# Altium PCB L2-1.PcbDoc
Units mm, origin at the board's own origin, x right, y up, seen from the top; angles counter-clockwise.
Board outline 68 x 50 mm, 2 copper layers (Top Layer, Bottom Layer), stack 0.325 mm thick; 94 components, 94 nets, 313 pads, 355 vias.
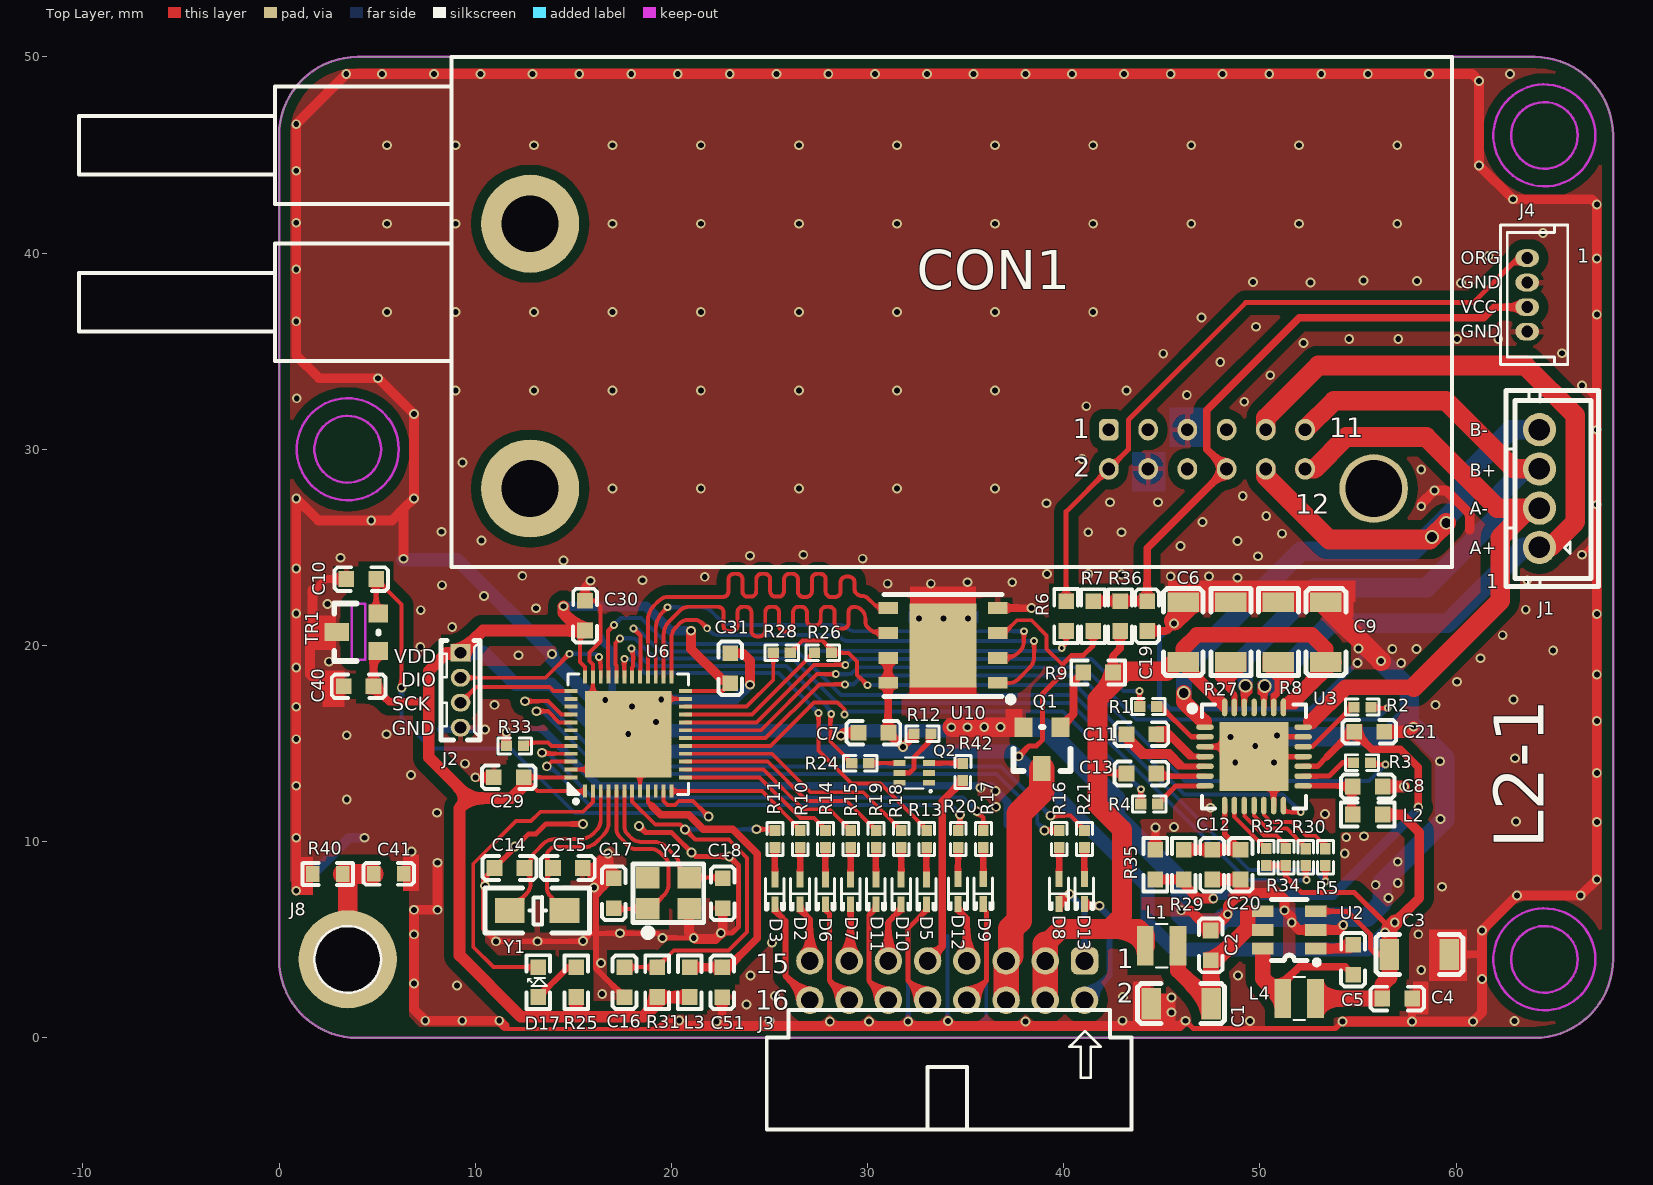
[diagram p0: Top Layer view]
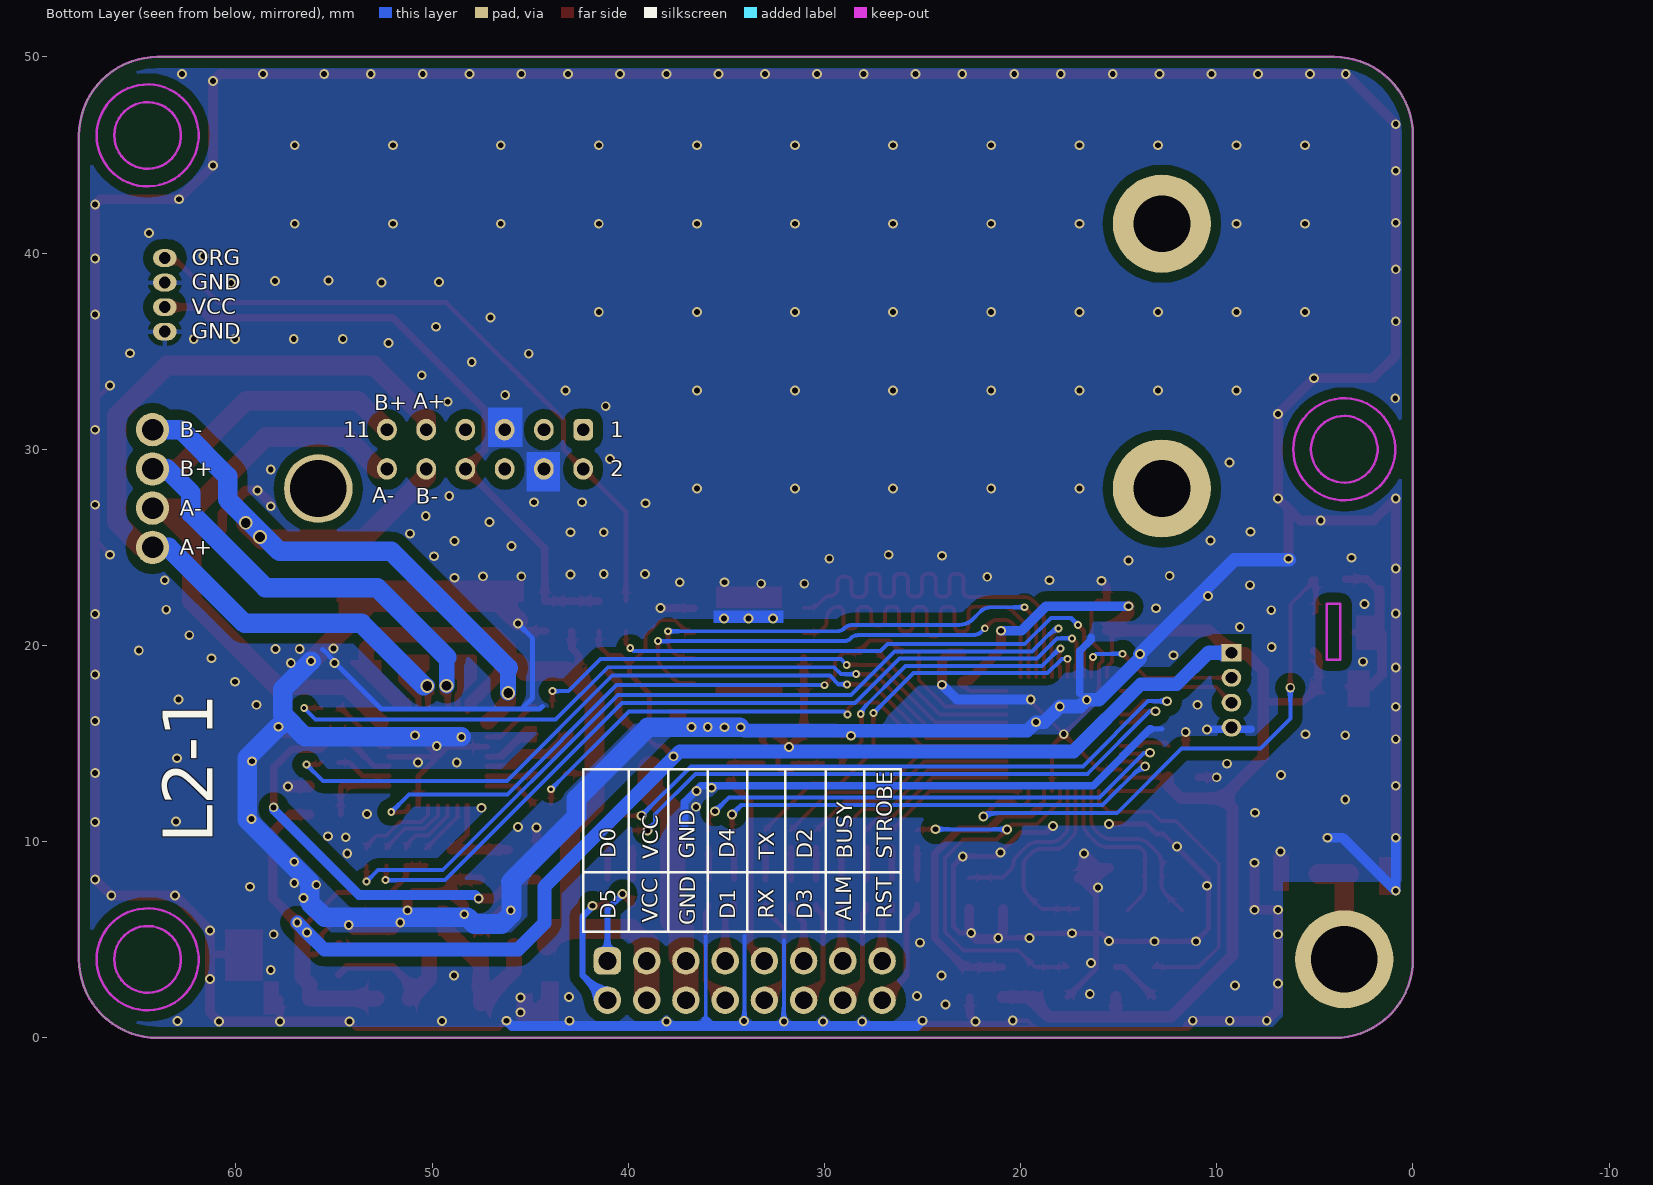
[diagram p1: Bottom Layer view, seen from below]

## Layer stack, top to bottom
Top Solder: solder mask 0.0102, Solder Resist, Dk 3.5
Top Layer: signal copper 0.0356
Dielectric 1: core 0.254, FR-4, Dk 4.2
Bottom Layer: signal copper 0.0356
Bottom Solder: solder mask 0.0102, Solder Resist, Dk 3.5

## Board outline
0,4 0,46 cw(c4,46) 4,50 64,50 cw(c64,46) 68,46 68,4 cw(c64,4) 64,0 4,0 cw(c4,4)

## Design rules (kind name [scope] priority, off if disabled: settings)
Clearance Clearance_1 [InPolygon] p1: gap=0.5
Clearance [All] p2: gap=0.14
PolygonConnect PolygonConnect_1 [IsVia] p1: connectstyle=Direct reliefconductorwidth=0.254 reliefentries=4 polygonreliefangle="90 Angle" airgapwidth=0.254
PolygonConnect [All] p2: connectstyle=Relief reliefconductorwidth=0.254 reliefentries=4 polygonreliefangle="90 Angle" airgapwidth=0.254
RoutingVias [All] p1: holewidth=0.3 width=0.5 viastyle="Through Hole" minholewidth=0.15 minwidth=0.3 maxholewidth=0.711 maxwidth=1.27
SolderMaskExpansion [All] p1: expansion=0.102
Width [All] p1: maxlimit=2.54 minlimit=0.1 preferedwidth=0.254
30 further rules are at their usual default settings.

## Classes and differential pairs
component class POWER_PART: C1 C2 C3 C4 C5 C41 D2 D3 D5 D6 D7 D8 D9 D10 D11 D12 D13 D17 J3 J8 L1 L4 Q1 Q2 R9 R10 R11 R12 R13 R14 R15 R16 R17 R18 R19 R20 R21 R24 R25 R40 R42 U2
component class Motor: C6 C8 C9 C11 C12 C13 C19 C20 C21 CON1 J1 J4 L2 R1 R2 R3 R4 R5 R6 R7 R8 R26 R27 R28 R29 R30 R32 R34 R35 R36 U3
component class MCU_PART: C10 C14 C15 C16 C17 C18 C29 C30 C31 C40 C51 J2 L3 R31 R33 TR1 U6 Y1 Y2
component class SPI_FLASH: C7 U10

## Components (designator, comment, footprint, x,y, rotation, side; value= is the part's Value field where it differs from the comment)
C1 "47UF/25V" 1206c 45.986,1.74 r180 top locked
C2 "106/25V" 0603C/1#1 47.49,4.71 r90 top locked
C3 "47UF/25V" 1206c 58.125,4.25 r0 top locked
C4 "106/25V" 0603C/1#1 57,2 r0 top locked
C5 "104" 0603C/1#1 54.75,3.975 r270 top locked
C6 "47UF/25V" 1206c 46.09,20.68 r90 top locked
C7 "104" 0603C/1#1 30.3,15.55 r180 top locked
C8 "104" 0603c/1 55.5,12.81 r0 top locked
C9 "47UF/25V" 1206c 53.36,20.68 r90 top locked
C10 "104" 0603C/1#1 4.185,23.385 r0 top locked
C11 "223" 0603C/1#1 43.96,15.48 r180 top locked
C12 "106/25V" 0603C/1#1 47.563,8.828 r90 top locked
C13 "104" 0603C/1#1 43.96,13.47 r180 top locked
C14 "12PF" 0603C/1#1 11.748,8.659 r180 top locked
C15 "12PF" 0603C/1#1 14.722,8.66 r0 top locked
C16 "105" 0603C/1#1 17.609,2.837 r90 top locked
C17 "12PF" 0603C/1#1 17.06,7.37 r270 top locked
C18 "12PF" 0603C/1#1 22.62,7.37 r90 top locked
C19 "104" 0603C/1#1 44.25,21.5 r270 top locked
C20 "106/25V" 0603C/1#1 49.01,8.828 r90 top locked
C21 "106/25V" 0603C/1#1 55.57,15.6 r0 top locked
C29 "104" 0603C/1#1 11.708,13.28 r0 top locked
C30 "104" 0603C/1#1 15.6,21.525 r270 top locked
C31 "104" 0603C/1#1 23,18.842 r270 top
C40 "104" 0603C/1#1 4.053,17.925 r0 top locked
C41 "102/630V" 0603C/1#2 5.587,8.36 r180 top locked
C51 "106/25V" 0603C/1#1 22.59,2.837 r90 top locked
CON1 "DICON-MVOA" DICON_MVOA_2.0_2X6 42.3,29 r0 top locked
D2 "1N4148WT" SOD-523_L1.2-W0.8 26.558,7.44 r90 top locked
D3 "1N4148WT" SOD-523_L1.2-W0.8 25.27,7.44 r90 top locked
D5 "1N4148WT" SOD-523_L1.2-W0.8 33,7.44 r90 top locked
D6 "1N4148WT" SOD-523_L1.2-W0.8 27.847,7.44 r90 top locked
D7 "1N4148WT" SOD-523_L1.2-W0.8 29.135,7.44 r90 top locked
D8 "1N4148WT" SOD-523_L1.2-W0.8 39.762,7.46 r90 top locked
D9 "1N4148WT" SOD-523_L1.2-W0.8 35.897,7.46 r90 top locked
D10 "1N4148WT" SOD-523_L1.2-W0.8 31.712,7.44 r90 top locked
D11 "1N4148WT" SOD-523_L1.2-W0.8 30.423,7.44 r90 top locked
D12 "1N4148WT" SOD-523_L1.2-W0.8 34.608,7.46 r90 top locked
D13 "1N4148WT" SOD-523_L1.2-W0.8 41.05,7.46 r90 top locked
D17 "RED" LED0603 13.21,2.84 r90 top locked
J1 "NC" CONN-TH_4P-P2.0 64.25,28 r90 top locked
J2 "J-LINK SWD" HDR-SW_4P-P1.27-V0.6 9.25,17.72 r270 top locked
J3 "87833-1620" DIP_2.0_87833-1620 34.06,2.92 r0 top locked
J4 "NC" CONN-TH_4P-P1.25 63.625,37.875 r90 top locked
J8 "screw" VIA3.4-5 3.5,4 r0 top locked
L1 "FTC252010S220MBCA" IND-SMD_L2.5-W2.0 44.99,4.69 r180 top locked
L2 "600@100MHZ" 0603R/1#1 55.5,11.38 r0 top locked
L3 "600@100MHZ" 0603R/1#1 20.932,2.839 r270 top locked
L4 "FTC252012S100MBCA" IND-SMD_L2.5-W2.0 52,2 r0 top locked
Q1 "AOSS32334C" SOT-23-N 39.841,15.84 r180 top locked
Q2 "2N7002VC" SOT-563_L1.6-W1.2-P0.5 32.375,13.5 r0 top locked
R1 "22R" 0402R/1#1 44.307,16.89 r0 top locked
R2 "22R" 0402R/1#1 55.22,16.86 r180 top locked
R3 "22R" 0402R/1#1 55.2,14.03 r180 top locked
R4 "22R" 0402R/1#1 44.36,11.92 r0 top locked
R5 "22R" 0402R/1#1 53.339,9.207 r90 top locked
R6 "1K" 0603R/1#1 40.125,21.5 r90 top locked
R7 "NC" 0603R/1#1 41.5,21.5 r270 top locked
R8 "HoYH1206-1W-330mR-1%" 1206R 50.937,20.68 r90 top locked
R9 "10K" 0603R/1#1 41.75,18.625 r0 top locked
R10 "1K" 0402R/1#1 26.568,10.14 r90 top locked
R11 "1K" 0402R/1#1 25.28,10.14 r90 top locked
R12 "4K7" 0402R/1#1 32.8,15.5 r0 top locked
R13 "100R" 0402R/1#1 33.009,10.14 r90 top locked
R14 "1K" 0402R/1#1 27.856,10.14 r90 top locked
R15 "1K" 0402R/1#1 29.145,10.14 r90 top locked
R16 "1K" 0402R/1#1 39.772,10.143 r270 top locked
R17 "1K" 0402R/1#1 35.906,10.14 r90 top locked
R18 "1K" 0402R/1#1 31.722,10.143 r270 top locked
R19 "1K" 0402R/1#1 30.434,10.143 r270 top locked
R20 "1K" 0402R/1#1 34.619,10.143 r270 top locked
R21 "1K" 0402R/1#1 41.06,10.143 r270 top locked
R24 "100R" 0402R/1#2 29.625,14 r180 top locked
R25 "4.7K" 0603R/1#1 15.15,2.84 r270 top locked
R26 "1K" 0402R/1#1 27.72,19.625 r180 top locked
R27 "HoYH1206-1W-330mR-1%" 1206R 48.513,20.68 r90 top locked
R28 "22R" 0402R/1#1 25.625,19.625 r180 top locked
R29 "10K 0.1%" 0603R/1#1 46.118,8.828 r90 top locked
R30 "22R" 0402R/1#1 52.333,9.207 r90 top locked
R31 "5.6K" 0603R/1#1 19.272,2.839 r270 top locked
R32 "1K" 0402R/1#1 50.32,9.21 r270 top locked
R33 "1K" 0402R/1#1 12.017,14.88 r0 top locked
R34 "1K" 0402R/1#1 51.326,9.21 r270 top locked
R35 "10K 0.1%" 0603R/1#1 44.67,8.83 r270 top locked
R36 "0R" 0603R/1#1 42.875,21.5 r270 top locked
R40 "1M" 0603R/1#2 2.483,8.354 r180 top locked
R42 "22R" 0402R/1#2 34.859,13.549 r90 top locked
TR1 "MCP9700A" SOT-23-3 4,20.675 r90 top locked
U2 "LMR50410Y3FQDBVRQ1" SOT-23-6_L2.9-W1.6-P0.95 51.5,5.5 r180 top locked
U3 "TMC2209-LA-T" QFN-28_L5.0-W5.0-P0.50 49.7,14.34 r270 top locked
U6 "AT32F403ACGU7" QFN-48_L6.0-W6.0-P0.40 17.8,15.48 r0 top locked
U10 "W25Q128JVPIQ" WSON-8_L5.0-W6.0-P1.27 33.845,20 r180 top locked
Y1 "32.768K" 3215-2 14.554,6.49 r180 top locked
Y2 "8M" 3225-4 18.8,6.57 r0 top locked

## Footprints (in the part's own frame and the unit in brackets; to place one, negate y for a bottom-side part, rotate by r counter-clockwise, add the part's x,y. Pads: shape width x height; smd on the part's side, far side on the other; paste and mask are expansions set on the pad)
0402R/1#1 [mm]
  rect 0.566x0.54 smd paste-100 mask+0.051: 1(-0.433,0) 2(0.433,0)
  silkscreen extent -0.84,-0.4 0.85,0.4
0402R/1#2 [mm]
  rect 0.566x0.54 smd paste-100 mask+0.051: 1(0.433,0) 2(-0.433,0)
  silkscreen extent -0.85,-0.4 0.84,0.4
0603C/1#1 [mm]
  rect 0.8x0.8 smd: 1(-0.762,0) 2(0.762,0)
  silkscreen extent -1.37,-0.61 1.37,0.61
0603C/1#2 [mm]
  rect 0.7x0.8 smd: 1(-0.762,0) 2(0.762,0)
  silkscreen extent -1.28,-0.56 1.28,0.56
0603c/1 [mm]
  rect 0.8x0.8 smd: 1(-0.762,0) 2(0.762,0)
  silkscreen extent -1.37,-0.61 1.37,0.61
0603R/1#1 [mm]
  rect 0.8x0.8 smd: 1(-0.762,0) 2(0.762,0)
  silkscreen extent -1.37,-0.61 1.37,0.61
0603R/1#2 [mm]
  rect 0.7x0.8 smd: 1(-0.762,0) 2(0.762,0)
  silkscreen extent -1.28,-0.56 1.28,0.56
1206c [mm]
  rect 1x1.6 smd: 1(-1.524,0) 2(1.524,0)
  silkscreen extent -2.21,-1.02 2.22,1.01
1206R [mm]
  rect 1x1.6 smd: 1(-1.524,0) 2(1.524,0)
  silkscreen extent -2.21,-1.02 2.22,1.01
3215-2 [mil]
  rect 60x50 smd: 1(0,0) 2(110,0)
  silkscreen extent -50,-45 159,45
3225-4 [mm]
  rect 1.2x1.1 smd: 1(0,0) 2(2.1,0) 3(2.1,1.6) 4(0,1.6)
  silkscreen extent -0.75,-1.38 2.85,2.3
CONN-TH_4P-P1.25 [mm]
  oval 0.9x1.2 hole 0.6 paste+0 mask+0.05: 1(1.875,0) 2(0.625,0) 3(-0.625,0) 4(-1.875,0)
  silkscreen extent -3.56,-2.07 3.56,1.36
CONN-TH_4P-P2.0 [mm]
  round 1.7 hole 1.1: 1(-3,0) 2(-1,0) 3(1,0) 4(3,0)
  silkscreen extent -5,-3 5,1.7
DICON_MVOA_2.0_2X6 [mm]
  round 5 hole 2.9: 0(-29.5,-1) 0(-29.5,12.5)
  round 3.5 hole 2.9: 0(13.5,-1)
  rrect50% 1x1.1 hole 0.65: 1(0,2)
  oval 1x1.1 hole 0.65: 2(0,0) 3(2,2) 4(2,0) 5(4,2) 6(4,0) 7(6,2) 8(6,0) 9(8,2) 10(8,0) 11(10,2) 12(10,0)
  silkscreen extent -52.5,-5 17.5,21
DIP_2.0_87833-1620 [mm]
  rrect50% 1.4x1.4 hole 0.9: 1(7,1)
  round 1.4 hole 0.9: 2(7,-1) 3(5,1) 4(5,-1) 5(3,1) 6(3,-1) 7(1,1) 8(1,-1) 9(-1,1) 10(-1,-1) 11(-3,1) 12(-3,-1) 13(-5,1) 14(-5,-1) 15(-7,1) 16(-7,-1)
  silkscreen extent -9.2,-7.6 9.4,-1.5
HDR-SW_4P-P1.27-V0.6 [mm]
  rect 0.9x1 hole 0.6: 1(-1.905,0)
  oval 0.9x1 hole 0.6: 2(-0.635,0) 3(0.635,0) 4(1.905,0)
  silkscreen extent -2.54,-1 2.54,1
IND-SMD_L2.5-W2.0 [mm]
  rect 0.85x2 smd: 1(-0.83,0) 2(0.83,0)
  silkscreen extent -0.29,-1.1 0.29,1.1
LED0603 [mm]
  rect 0.8x0.8 smd: 1(-0.762,0) 2(0.762,0)
  silkscreen extent -1.37,-0.61 1.37,0.61
QFN-28_L5.0-W5.0-P0.50 [mm]
  rect 3.5x3.5 smd: 0(0,0)
  oval 0.28x0.9 smd paste-100 mask+0.051: 1(-1.501,-2.5) 2(-1.001,-2.5) 3(-0.501,-2.5) 4(0,-2.5) 5(0.5,-2.5) 6(1.001,-2.5) 7(1.501,-2.5) 15(1.501,2.5) 16(1.001,2.5) 17(0.5,2.5) 18(0,2.5) 19(-0.501,2.5) 20(-1.001,2.5) 21(-1.501,2.5)
  oval 0.9x0.28 smd paste-100 mask+0.051: 8(2.5,-1.501) 9(2.5,-1.001) 10(2.5,-0.501) 11(2.5,0) 12(2.5,0.5) 13(2.5,1.001) 14(2.5,1.501) 22(-2.5,1.501) 23(-2.5,1.001) 24(-2.5,0.5) 25(-2.5,0) 26(-2.5,-0.501) 27(-2.5,-1.001) 28(-2.5,-1.501)
  silkscreen extent -2.65,-3.3 2.65,2.65
QFN-48_L6.0-W6.0-P0.40 [mm]
  rect 0.2x0.665 smd paste-100 mask+0.05: 1(-2.2,-2.908) 2(-1.8,-2.908) 3(-1.4,-2.908) 4(-1,-2.908) 5(-0.6,-2.908) 6(-0.2,-2.908) 7(0.2,-2.908) 8(0.6,-2.908) 9(1,-2.908) 10(1.4,-2.908) 11(1.8,-2.908) 12(2.2,-2.908) 25(2.2,2.908) 26(1.8,2.908) 27(1.4,2.908) 28(1,2.908) 29(0.6,2.908) 30(0.2,2.908) 31(-0.2,2.908) 32(-0.6,2.908) 33(-1,2.908) 34(-1.4,2.908) 35(-1.8,2.908) 36(-2.2,2.908)
  rect 0.665x0.2 smd paste-100 mask+0.05: 13(2.908,-2.2) 14(2.908,-1.8) 15(2.908,-1.4) 16(2.908,-1) 17(2.908,-0.6) 18(2.908,-0.2) 19(2.908,0.2) 20(2.908,0.6) 21(2.908,1) 22(2.908,1.4) 23(2.908,1.8) 24(2.908,2.2) 37(-2.908,2.2) 38(-2.908,1.8) 39(-2.908,1.4) 40(-2.908,1) 41(-2.908,0.6) 42(-2.908,0.2) 43(-2.908,-0.2) 44(-2.908,-0.6) 45(-2.908,-1) 46(-2.908,-1.4) 47(-2.908,-1.8) 48(-2.908,-2.2)
  rect 4.4x4.4 smd paste-100 mask+0.05: 49(0,0)
  silkscreen extent -3.08,-3.53 3.08,3.08
SOD-523_L1.2-W0.8 [mm]
  rect 0.8x0.36 smd paste+0 mask+0.051: 1(0.635,0) 2(-0.635,0)
  silkscreen extent -0.94,-0.55 0.68,0.54
SOT-23-3 [mm]
  rect 0.914x1 smd: 1(-0.95,-1.06) 2(0.95,-1.06)
  rect 0.914x1.27 smd: 3(0.011,1.06)
  silkscreen extent -1.46,-1.06 1.46,1.19
SOT-23-6_L2.9-W1.6-P0.95 [mm]
  rect 1.1x0.6 smd paste+0 mask+0.051: 1(-1.35,0.95) 2(-1.35,0) 3(-1.35,-0.95) 4(1.35,-0.95) 5(1.35,0) 6(1.35,0.95)
  silkscreen extent -1.52,-1.55 0.9,1.78
SOT-23-N [mm]
  rect 0.914x1 smd: 1(0,0) 3(1.9,0)
  rect 0.914x1.27 smd: 2(0.961,2.12)
  silkscreen extent -0.51,0 2.41,2.25
SOT-563_L1.6-W1.2-P0.5 [mm]
  rect 0.6x0.3 smd paste+0.051: 1(0.75,-0.5) 2(0.75,0) 3(0.75,0.5) 4(-0.75,0.5) 5(-0.75,0) 6(-0.75,-0.5)
  silkscreen extent -0.48,-0.99 0.9,0.79
VIA3.4-5 [mm]
  round 5 hole 3.4: 1(0,0)
WSON-8_L5.0-W6.0-P1.27 [mm]
  rect 3.4x4.3 smd: 0(0,0)
  rect 1x0.6 smd: 1(-2.8,1.905) 2(-2.8,0.635) 3(-2.8,-0.635) 4(-2.8,-1.905) 5(2.8,-1.905) 6(2.8,-0.635) 7(2.8,0.635) 8(2.8,1.905)
  silkscreen extent -3.6,-2.6 3,2.9

## Part data
C1 C2 C3 C4 C5 C6 C7 C8 C9 C10 C11 C12 C13 C14 C15 C16 C17 C18 C19 C20 C21 C29 C30 C31 C40 C41 C51: library part 电容, "Capacitor"
CON1: library part "Header 6X2"
D2 D3 D5 D6 D7 D8 D9 D10 D11 D12 D13: library part DIODE_5
D17: library part LED
J1: library part CON4, "SOCKET-XH2.54-4P"
J2: library part CON4, "SOCKET"
J3: library part DCOM16/1
J4: library part CON4, "SOCKET-ZX-MX1.25-4PZZ"
J8: library part hold
L1 L4: library part 电感, "Inductor"
L2 L3: library part 磁珠, "Inductor"
Q1: library part AO3400
Q2: library part 2N7002VC-7
R1 R2 R3 R4 R5 R6 R7 R8 R9 R10 R11 R12 R13 R14 R15 R16 R17 R18 R19 R20 R21 R24 R26 R27 R28 R29 R30 R31 R32 R33 R34 R35 R36 R40 R42: library part RESS1, "Resistor"
R25: library part RES_4G
TR1: library part M1601Z
U2: library part LMR50410YFQDBVRQ1
U6: library part AT32F403ACGX7_48P
U10: library part W25Q256J
Y1: library part 晶振, "CRYSTAL"
Y2: library part 晶振_4P_2, "CRYSTAL"

## Via types
v1: diameter 0.5, hole 0.3, Top Layer to Bottom Layer, tented both sides, 324 vias
v2: diameter 0.4, hole 0.2, Top Layer to Bottom Layer, tented both sides, 26 vias
v3: diameter 0.7, hole 0.5, Top Layer to Bottom Layer, tented both sides, 5 vias

## Nets (pads, with @x,y where several pads share a name; then routed paths per layer and width w, separated by ;. In a path a pad name is that pad's centre, name@x,y a point inside that pad or via, vN(x,y) a via of type N, cw(c..) or ccw(c..) an arc to the next point about the centre after c; other vN are vias at no path point)
A+: CON1.9 J1.1 U3.24 | length 44.4
  Top Layer w0.28: U3.24 50.2,17.9 50.25,17.95 50.26,17.94 v3(50.25,17.94)
  Top Layer w0.8: J1.1 J1.1@64.775,25
  Top Layer w1: CON1.9 50.3,31.6 52.975,34.275 63.525,34.275 66.075,31.725 66.075,26.3 J1.1@64.775,25
  Bottom Layer w0.8: v3(50.25,17.94) v3@50.415,17.94
  Bottom Layer w1: v3@50.415,17.94 53.6,21.125 59.55,21.125 63.425,25 J1.1
A-: CON1.12 J1.2 U3.21 | length 32.2
  Top Layer w0.8: 52.605,16.105 54.375,17.875 57.85,17.875 ; J1.2@63.75,27 J1.2 J1.2@63.75,27
  Top Layer w1: CON1.12 52.775,29 54.4,30.625 58.475,30.625 62.1,27 63.75,27 62.25,25.5 62.25,22.275 57.85,17.875
ALRAM: R14.2 U6.13 | length 8.3
  Top Layer w0.2: U6.13 24.5,13.28 26.57,11.21 27.27,11.21 27.856,10.624 R14.2
B+: CON1.11 J1.3 U3.26 | length 36.6
  Top Layer w0.28: U3.26 49.2,17.87 49.229,17.84 49.29,17.901 49.241,17.95 v3(49.26,17.95)
  Top Layer w1: CON1.11 53.775,32.475 59.475,32.475 62.95,29 J1.3
  Bottom Layer w0.8: v3(49.26,17.95) 49.26,19.41 ; J1.3@63.85,29.05 J1.3@64.2,29.05
  Bottom Layer w1: 49.26,19.41 52.8,22.95 58.5,22.95 62.3,26.75 62.3,27.775 63.525,29 J1.3
B-: CON1.10 J1.4 U3.1 | length 38.3
  Top Layer w0.8: v3(46.12,17.58) 46.12,17.13 47.145,16.105
  Top Layer w1: CON1.10 50.3,28.625 53.525,25.4 58.65,25.4 v3(58.775,25.525) v3(59.5,26.25)
  Bottom Layer w0.8: v3@46.13,17.6 46.13,18.855
  Bottom Layer w1: 46.13,18.855 52.075,24.8 57.775,24.8 60.425,27.45 60.425,28.625 62.8,31 J1.4
BOOT0: R33.2 U6.44 | length 2.6
  Top Layer w0.2: R33.2 12.62,15.05 13.71,15.05 13.88,14.88 U6.44
BUSY: R15.2 U6.14 | length 9.7
  Top Layer w0.2: U6.14 24.69,13.68 26.72,11.65 28.068,11.65 R15.2
D0: R16.1 U6.41 | length 31.4
  Top Layer w0.2: v1(13.12,16.65) 13.7,16.65 14.27,16.08 U6.41 ; v1(39.026,10.576) R16.1
  Bottom Layer w0.2: v1(13.12,16.65) 13.4,16.65 16.6,13.45 36.575,13.45 38.65,11.375 38.65,10.952 v1(39.026,10.576)
D1: R17.2 U6.45 | length 26.1
  Top Layer w0.2: v1(13.4,14.53) 13.45,14.48 U6.45 ; v1(35.58,11.55) 35.9,11.23 35.9,10.607 35.92,10.587 R17.2
  Bottom Layer w0.2: v1(13.4,14.53) 13.71,14.53 15.98,12.26 34.87,12.26 v1(35.58,11.55)
D2: R18.1 U6.16 | length 12.6
  Top Layer w0.2: U6.16 25.12,14.48 27.08,12.52 29.778,12.52 R18.1
D3: R19.1 U6.15 | length 11.2
  Top Layer w0.2: U6.15 24.91,14.08 26.92,12.07 28.94,12.07 R19.1
D4: R20.1 U6.46 | length 24.3
  Top Layer w0.2: v1(13.65,13.84) 13.89,14.08 U6.46 ; R20.1 34.71,10.667 v1(34.71,11.39)
  Bottom Layer w0.2: v1(13.65,13.84) 13.85,13.84 15.83,11.86 34.24,11.86 v1(34.71,11.39)
D5: R21.1 U6.40 | length 33.9
  Top Layer w0.2: v1(12.53,17.16) 13.71,17.16 14.39,16.48 U6.40 ; v1(39.325,11.325) 40.335,11.325 41.06,10.6 R21.1
  Bottom Layer w0.2: v1(12.53,17.16) 13.5,17.16 16.82,13.84 36.81,13.84 v1(39.325,11.325)
GND: C1.2 C2.2 C3.2 C4.2 C6.2 C7.2 C8.2 C9.2 C10.1 C12.1 C14.2 C15.2 C16.1 C17.1 C18.1 C19.2 C20.1 C21.2 C29.1 C30.1 C31.1 C40.1 C41.1 C51.1 CON1.4 CON1.5 J2.4 J4.2 J4.4 Q1.3 R8.2 R27.2 R33.1 R35.1 R40.2 TR1.3 U2.2 U3.0 U3.3 U3.13 U3.18 U3.20 U6.8 U6.23 U6.35 U6.47 U6.49 U10.0 U10.4 Y2.2 | length 557.6
  Top Layer w0.2: 11.5,0.6 11.65,0.45 19.21,0.45 ; U6.47 16,13.68 v1(17.8,15.48) ; C30.1@15.59,22.294 15.6,22.294 16.076,22.294 16.375,21.995 16.375,20.205 15.82,19.65 15.82,19.2 16,19.02 U6.35 16,17.28 v1(17.8,15.48) ; U6.8 18.4,14.88 v1(17.8,15.48) ; v1(20.4,0.88) 19.64,0.88 19.21,0.45 ; U6.23 19.6,17.28 v1(17.8,15.48) ; 21.115,0.6 20.965,0.45 19.21,0.45
  Top Layer w0.254: v1(15.5,10.9) 13.6,10.9 13.1,10.4 12.727,10.4 C14.2 10.425,8.098 10.425,5.555 v1(11.06,4.92) v1(13.175,4.92) 15.47,4.92 v1(15.49,4.94) 15.88,5.33 16.15,5.33 v1(17.375,5.33) 19.31,5.33 v1(19.55,5.09) v1(21.14,5.09) ; v1(18.35,10.8) 18.675,10.475 20,10.475 21.225,9.25 v1(22.95,9.25) 23.425,8.775 23.425,5.675 23.09,5.34 22.55,5.34 v1(22.52,5.34) ; v1(46.2,0.87) 46.595,0.475 53.85,0.475 v1(54.212,0.837) ; v1(66.425,24.625) 67.175,25.375 ; v1(66.425,33.25) 67.175,32.5
  Top Layer w0.28: U3.3 49.2,14.84 U3.0 ; U3.13 50.701,13.339 U3.0 ; U3.18 U3.0 ; U3.20 50.701,15.341 U3.0
  Top Layer w0.3: C15.2 16.15,7.994 v1@16.15,7.66 ; v1(16.06,7.66) v1@16.15,7.66 ; C17.1 16.588,7.66 ; C16.1 16.15,3.534 16.15,5.33 16.15,7.222 ; 16.15,7.222 16.588,7.66 ; 16.15,7.222 v1@16.15,7.66 ; v1@16.15,7.66 16.588,7.66
  Top Layer w0.381: v1@0.875,23.775 v1(0.875,23.925) ; 1.686,20.686 TR1.3 ; 1.755,22.775 2.365,23.385 C10.1 ; 2.165,17.925 C40.1 ; v1(10.005,13.28) C29.1 ; R33.1 v1(11.584,15.591) ; C30.1 15.6,22.294 15.6,23.03 v1(15.87,23.3) ; v1(22.3,0.84) 22.59,1.13 C51.1 ; U10.4 v1(38.36,21.905) ; C19.2@44.2,20.738 C19.2 45.238,20.738 v1(45.62,21.12) ; R35.1 v1(44.67,10.72) ; v1@57.762,0.85 C4.2 ; C3.2 61.313,4.25
  Top Layer w0.5: v1(0.875,7.496) v1(0.875,10.2) v1(0.875,12.85) v1(0.875,15.225) v1(0.875,16.875) v1(0.875,18.875) v1(0.875,21.625) v1@0.875,23.775 ; v1(0.875,23.925) v1(0.875,27.5) 2,26.375 v1(4.7,26.375) 5.75,26.375 6.349,26.974 ; 1.706,22.824 1.706,20.706 1.686,20.686 1.575,20.575 1.575,18.515 2.165,17.925 ; v1(6.349,24.419) 6.349,26.974 ; v1(8.075,8.925) v1(8.075,6.525) v1(6.875,6.525) v1(6.875,5.275) v1(6.875,2.775) 6.875,1.45 v1(7.45,0.875) v1(9.337,0.875) v1(11.225,0.875) 11.5,0.6 ; C15.2 16.03,8.66 v1(16.77,9.4) 16.77,8.422 C17.1 ; v1(20.4,0.88) 20.68,0.6 21.115,0.6 45.93,0.6 v1(46.2,0.87) ; Y2.2 20.9,5.36 21.23,5.03 22.24,5.03 22.55,5.34 22.62,5.41 C18.1 ; C31.1 23.621,19.604 24,19.225 v1(24,18) ; v1(28.65,15.4) 28.8,15.55 C7.2 ; C1.2@44.462,1.313 C1.2 ; v1(45.99,6.5) 46.462,6.5 C2.2 47.532,5.472 v1(48.36,6.3) 48.36,6.735 49.01,7.385 ; C12.1 C20.1 49.01,7.385 ; v1(54.212,0.837) v1(57.75,0.837) v1(60.862,0.837) 61.325,1.3 v1(61.325,3) v1(61.325,5.475) v1(63.1,7.25) v1(66.35,7.25) v1(67.175,8.075) v1(67.175,11) v1(67.175,13.5) v1(67.175,16.15) v1(67.175,18.525) v1(67.175,21.6) 67.175,25.375 v1(67.175,27.175) v1(67.175,31) 67.175,32.5 v1(67.175,36.875) v1(67.175,39.725) v1(67.175,42.475) 66.9,42.75 v1(62.9,42.75) v1(61.175,44.475) v1(61.175,48.775) 60.825,49.125 v1(58.625,49.125) v1(55.5,49.125) v1(53.125,49.125) v1(50.475,49.125) v1(48.1,49.125) v1(45.45,49.125) v1(43.075,49.125) v1(40.425,49.125) v1(38.05,49.125) v1(35.4,49.125) v1(33.025,49.125) v1(30.375,49.125) v1(28,49.125) v1(25.35,49.125) v1(22.975,49.125) v1(20.325,49.125) v1(17.95,49.125) v1(15.3,49.125) v1(12.925,49.125) v1(10.275,49.125) v1(7.9,49.125) v1(5.25,49.125) v1(3.425,49.125) v1(0.875,46.575) v1(0.875,44.2) v1(0.875,41.55) v1(0.875,39.175) v1(0.875,36.525) 0.875,34.775 2.025,33.625 v1(5.05,33.625) v1(6.875,31.8) v1(6.875,27.5) 6.349,26.974 ; v1(54.25,5.75) 54,5.5 U2.2 52,5.5 v1(51.625,5.875) 51.625,6.125 v1(51.25,6.5) 51.25,7.075 50.94,7.385 49.01,7.385 ; v1(58.225,27.1) 58.225,27.225 v1(58.9,27.9) 59.5,27.9 60.7,26.7 60.7,25.9
  Top Layer w0.6: C8.2 v1(57.35,12.81) ; C21.2 57.57,15.6 v1(57.83,15.86)
  Top Layer w0.8: C6.2@46.09,21.84 C6.2
  Top Layer w1: v1@34.33,15.83 v1(35.09,15.83) Q1.3@37.86,15.83 ; v1@45.62,21.27 46.09,21.74 C6.2@46.09,21.84 ; C6.2 R27.2 R8.2 C9.2@53.176,22.204 ; C9.2 C9.2@53.176,22.204 ; v1(56.175,19.205) C9.2@53.176,22.204
  Bottom Layer w0.2: v1(32.07,0.83) 32.07,4.955 ; 34.075,5.2 34.075,0.875 v1(34.1,0.85) ; 35.825,0.75 36.05,0.975 36.05,5.175
  Bottom Layer w0.254: 12.8,15.75 13.35,15.75 ; 44.375,16.9 44.525,16.75 45.45,16.75 ; v1(45.62,21.12) 44.875,20.375 44.875,17.325 45.45,16.75 ; 55.58,19.8 54.975,19.195 v1(54.975,19.1) 54.925,19.1 52.575,16.75 45.45,16.75
  Bottom Layer w0.381: 8.25,15.725 v1(10.5,15.725) ; 16.4,20.425 16.4,20.3 16.972,19.728 16.972,17.572
  Bottom Layer w0.4: 13.35,15.75 13.4,15.75 16.3,12.85 36.3,12.85 37.125,12.025 37.125,10.875
  Bottom Layer w0.5: v1(0.875,10.2) v1(0.875,7.496) 3.579,10.2 v1(4.35,10.2) ; v1(19.48,17.25) 23.25,17.25 v1(24,18) ; v1(25,0.875) 25.275,0.6 35.8,0.6 ; 36.05,0.85 35.8,0.6 ; v1(46.2,0.87) 45.93,0.6 35.8,0.6
  Bottom Layer w0.7: v1@6.3,24.37 9.1,24.37 v1(13.91,19.56) 13.91,19.34 16.02,17.23 v1(16.63,17.23) 16.97,16.89 v1(18,16.89) 18.8,16.09 v1(19.22,16.09) 19.66,15.65 34.09,15.65 v1(34.27,15.83)
  Bottom Layer w1: v1@34.32,15.83 v1(35.09,15.83) 38.995,15.83 42.64,12.185 42.64,11.29 45.99,7.94 45.95,7.9 45.95,6.31 46.46,5.8 47.85,5.8 48.2,6.15 55.48,6.15 56.24,6.91 56.24,7.94 59.425,11.125 59.425,14.265 v1(57.83,15.86) ; v1(48.51,15.34) 56.47,15.34 57.61,16.48 57.61,17.77 v1(56.175,19.205)
  other v1: 28.075,0.825 30.075,0.825 38.05,0.825 49.5,0.85 62.975,0.85 43,0.875 45.5,1.3 23.825,1.7 45.5,2.05 43.025,2.075 25.275,2.125 16.47,2.24 9.075,2.675 24.025,3.175 48.875,3.175 58.225,3.45 16.41,3.82 25.125,4.85 58.075,5.275 56.55,7.125 59.275,7.7 10.5,7.75 55.9,7.8 57.025,7.9 57.025,8.975 54.325,9.4 21.025,9.45 6.75,9.5 12.025,9.75 54.4,10.225 55.3,10.275 45.625,10.75 63.05,11.025 59.2,11.15 53.32,11.41 8.05,11.475 47.475,11.725 36.55,11.775 3.45,12.15 36.525,12.575 35.75,12.75 6.725,13.4 9.475,13.975 48.74,14.03 50.72,14.04 59.175,14.1 63,14.25 49.76,14.88 3.45,15.425 50.87,15.42 5.475,15.475 35.95,15.85 36.78,15.85 10.975,16.975 58.95,16.975 62.925,17.25 60.05,18.15 57.2,19.1 2.545,19.175 61.25,19.35 12.2,19.5 64.95,19.75 56.75,19.825 57.975,19.825 55.025,19.85 7.2,19.925 62.375,20.525 8.825,20.95 32.615,21.375 33.865,21.375 35.115,21.375 7.225,21.8 63.55,21.825 13.1,21.9 2.475,22.115 10.45,22.525 8.3,23.075 31.025,23.15 33.225,23.15 35.1,23.225 37.375,23.225 18.525,23.325 63.625,23.325 48.85,23.45 21.7,23.5 45.45,23.525 47.4,23.525 12.4,23.55 42.95,23.625 39.15,23.65 41.25,23.65 14.5,24.325 29.75,24.425 3.125,24.475 49.9,24.55 24,24.575 26.725,24.625 45.95,25.075 10.325,25.35 48.85,25.325 51.125,25.7 41.25,25.775 42.95,25.775 8.275,25.8 47.075,26.3 50.325,26.6 39.125,27.25 42.35,27.3 44.8,27.3 49.125,27.625 17,28 21.5,28 26.5,28 31.5,28 36.5,28 58.225,28.975 9.35,29.325 40.925,29.5 41.15,32.2 49.2,32.425 0.9,32.6 46.275,32.775 9,33 13,33 17,33 21.5,33 26.5,33 31.5,33 36.5,33 43.2,33 50.525,33.775 47.975,34.45 45.075,34.875 65.4,34.9 52.225,35.425 54.55,35.625 57.05,35.625 60.05,35.625 62.15,35.625 49.8,36.25 47.025,36.725 5.5,37 9,37 13,37 17,37 21.5,37 26.5,37 31.5,37 36.5,37 41.5,37 60.25,38.475 52.575,38.5 49.65,38.525 58,38.575 55.275,38.6 61.65,39.85 64.425,41.025 5.5,41.5 9,41.5 17,41.5 21.5,41.5 26.5,41.5 31.5,41.5 36.5,41.5 41.5,41.5 46.5,41.5 52,41.5 57,41.5 5.5,45.5 9,45.5 13,45.5 17,45.5 21.5,45.5 26.5,45.5 31.5,45.5 36.5,45.5 41.5,45.5 46.5,45.5 52,45.5 57,45.5 62.75,49.125
M_DIAG: R30.1 U6.32 | length 42.9
  Top Layer w0.2: U6.32 17.2,18.975 17.15,19.025 17.15,20.13 v2(17.38,20.36) ; R30.1 52.333,8.077 v2(52.37,8.04)
  Bottom Layer w0.2: v2(17.38,20.36) 18.14,20.36 19.17,19.33 26.18,19.33 28.45,17.06 40.315,17.06 49.335,8.04 v2(52.37,8.04)
M_DIR: R2.1 U6.19 | length 39.5
  Top Layer w0.2: U6.19 24.57,15.68 27.43,18.54 v2(28.38,18.54) ; R2.1@55.636,16.82 55.646,16.81 v2(56.52,16.81)
  Bottom Layer w0.2: v2@28.255,18.54 v2(28.38,18.54) 29.155,18.54 29.505,18.89 41.035,18.89 43.7,16.225 55.935,16.225 v2(56.52,16.81)
M_ENN: R1.1 U6.20 | length 26
  Top Layer w0.2: U6.20 24.33,16.08 27.26,19.01 v2(28.865,19.01) ; v2(43.86,17.68) 43.874,17.666 R1.1
  Bottom Layer w0.2: v2(28.865,19.01) 29.165,19.31 41.425,19.31 43.055,17.68 v2(43.86,17.68)
M_INDEX: R5.1 U6.29 | length 44
  Top Layer w0.2: v2(18.07,20.86) 18.43,20.5 18.43,18.78 18.4,18.75 U6.29 ; v2(53.339,7.971) R5.1
  Bottom Layer w0.2: v2(18.07,20.86) 18.26,20.86 19.42,19.7 26.42,19.7 28.64,17.48 40.525,17.48 49.455,8.55 52.76,8.55 v2(53.339,7.971)
M_ORG: R6.1 U6.33 | length 27.5
  Top Layer w0.2: U6.33 16.8,18.85 16.775,18.875 16.775,20.745 v2(17.08,21.05) ; v2(39.9,19.875) 40.125,20.1 R6.1
  Bottom Layer w0.2: v2(17.08,21.05) 17.44,21.41 18.45,21.41 19.79,20.07 26.78,20.07 27.14,19.71 39.735,19.71 v2(39.9,19.875)
M_RX3: R28.2 U6.22 | length 6.4
  Top Layer w0.2: U6.22 23.83,16.88 25.192,18.242 R28.2
M_SPREAD: R4.1 U6.17 | length 27.1
  Top Layer w0.2: U6.17 25.055,14.88 27.275,17.1 28.475,17.1 28.825,16.75 v2(28.825,16.475) ; R4.1 43.97,11.963 43.93,12.003 v2(43.93,12.67)
  Bottom Layer w0.2: v2(28.825,16.475) 28.99,16.64 39.96,16.64 v2(43.93,12.67)
M_STEP: R3.1 U6.18 | length 40.4
  Top Layer w0.2: U6.18 24.8,15.28 27.54,18.02 v2(28.855,18.02) ; R3.1@55.633,14.07 55.773,13.93 v2(56.41,13.93)
  Bottom Layer w0.2: v2(28.855,18.02) 29.285,18.02 29.725,18.46 40.815,18.46 46.185,13.09 55.57,13.09 v2(56.41,13.93)
M_TX3: R26.2 U6.21 | length 8
  Top Layer w0.2: U6.21 24.1,16.48 R26.2@27.245,19.625 ; R26.2@27.12,19.625 R26.2@27.245,19.625 ; R26.2 R26.2@27.245,19.625
MCU_RX: R13.2 U6.31 | length 21.1
  Top Layer w0.2: U6.31 v2(17.6,19.32) ; v2(27.5,16.55) 27.5,14.65 29.175,12.975 30.655,12.975 33.009,10.621 R13.2
  Bottom Layer w0.2: v2@17.596,19.326 v2@17.601,19.321 ; v2(17.6,19.32) 17.89,19.32 18.62,18.59 25.46,18.59 v2(27.5,16.55)
MCU_TX: R24.1 U6.30 | length 16.2
  Top Layer w0.2: v2@17.94,19.87 18.05,19.76 18.05,18.925 18,18.875 U6.30 ; v2(28.15,16.5) 28.1,16.45 28.1,15.092 R24.1
  Bottom Layer w0.2: v2(17.97,19.85) 18.02,19.85 18.91,18.96 25.865,18.96 28.15,16.675 v2(28.15,16.5)
NetC1_1: C1.1 C2.1 L1.1 U2.4 U2.5 | length 9.2
  Top Layer w0.8: L1.1 45.82,3.43 C1.1 47.51,3.928 C2.1 47.738,3.948 49.375,5.585 49.375,6.35
NetC5_1: C5.1 U2.1 | length 2
  Top Layer w0.5: U2.1 54.563,4.55 C5.1
NetC5_2: C5.2 L4.1 U2.6 | length 7.6
  Top Layer w0.381: L4.1 51.17,2.795 52,3.625 54.338,3.625 C5.2
  Top Layer w0.8: 50.15,4.25 50.15,3.02 L4.1
NetC8_1: C8.1 L2.1 U3.15 | length 3.9
  Top Layer w0.28: U3.15 54.629,12.839 54.658,12.81 L2.1@54.658,11.38
NetC11_1: C11.1 U3.4 | length 3
  Top Layer w0.28: C11.1 45.27,15.48 46.41,14.34 U3.4
NetC11_2: C11.2 U3.5 | length 4.7
  Top Layer w0.28: C11.2 44.208,14.47 45.36,14.47 45.99,13.84 U3.5
NetC12_2: C12.2 C20.2 R29.2 U3.8 | length 5.5
  Top Layer w0.28: U3.8 48.199,10.401 C20.2
  Top Layer w0.5: R29.2 C12.2 C20.2
NetC13_1: C13.1 U3.6 | length 2.5
  Top Layer w0.28: C13.1 44.853,13.339 U3.6
NetC21_1: C21.1 R29.1 R35.2 U3.17 | length 25.2
  Top Layer w0.28: U3.17 52.93,13.84 53.42,14.33
  Top Layer w0.381: 53.42,14.33 54.69,15.6 C21.1 55.708,14.7 57.16,14.7 58.075,13.785 v1(58.075,11.75)
  Top Layer w0.5: R35.2 45.892,8.068 46.85,7.11 v1(47.625,7.11)
  Bottom Layer w0.5: v1(47.625,7.11) 47.795,7.28 53.72,7.28 58.075,11.635 v1(58.075,11.75)
NetC41_2: C41.2 J8.1 R40.1 | length 5.7
  Top Layer w0.5: C41.2@4.818,8.354 C41.2
  Top Layer w1: R40.1 C41.2@4.818,8.354 ; J8.1 R40.1@3.5,8.099
NetD2_1: D2.1 R10.1 | length 1.6
  Top Layer w0.3: D2.1 26.558,9.697 R10.1
NetD2_2: D2.2 J3.15 | length 3.1
  Top Layer w0.3: D2.2 26.558,6.542 27.06,6.04 J3.15
NetD3_1: D3.1 R11.1 | length 1.6
  Top Layer w0.3: D3.1 25.27,9.697 R11.1
NetD3_2: D3.2 J3.16 | length 5.6
  Top Layer w0.3: D3.2 25.27,6.5 25.81,5.96 25.81,3.17 J3.16
NetD5_1: D5.1 R13.1 | length 1.6
  Top Layer w0.3: D5.1 33,9.698 R13.1
NetD5_2: D5.2 J3.10 | length 5.7
  Top Layer w0.254: D5.2 33,6.51 32.07,5.58 32.07,2.91 J3.10
NetD6_1: D6.1 R14.1 | length 1.6
  Top Layer w0.3: D6.1 27.847,9.697 R14.1
NetD6_2: D6.2 J3.14 | length 5.4
  Top Layer w0.254: D6.2 27.847,6.523 28.06,6.31 28.06,2.92 J3.14
NetD7_1: D7.1 R15.1 | length 1.6
  Top Layer w0.3: D7.1 29.135,9.697 R15.1
NetD7_2: D7.2 J3.13 | length 2.9
  Top Layer w0.3: J3.13 29.135,3.995 D7.2
NetD8_1: D8.1 R16.2 | length 1.6
  Top Layer w0.3: D8.1 39.762,9.7 R16.2
NetD8_2: D8.2 J3.1 | length 4.5
  Top Layer w0.3: D8.2 40.267,7.33 v1(40.29,7.33)
  Bottom Layer w0.3: v1(40.29,7.33) 41.06,6.56 J3.1
NetD9_1: D9.1 R17.1 | length 1.6
  Top Layer w0.3: D9.1 35.897,9.698 R17.1
NetD9_2: D9.2 J3.8 | length 5.4
  Top Layer w0.254: J3.8 36.07,2.93 36.07,6.4 35.897,6.573 D9.2
NetD10_1: D10.1 R18.2 | length 1.6
  Top Layer w0.3: D10.1 31.712,9.7 R18.2
NetD10_2: D10.2 J3.11 | length 3.2
  Top Layer w0.3: J3.11 31.06,5.9 31.712,6.552 D10.2
NetD11_1: D11.1 R19.2 | length 1.6
  Top Layer w0.3: D11.1 30.423,9.7 R19.2
NetD11_2: D11.2 J3.12 | length 5.4
  Top Layer w0.254: D11.2 30.423,6.613 30.07,6.26 30.07,2.91 J3.12
NetD12_1: D12.1 R20.2 | length 1.6
  Top Layer w0.3: D12.1 34.608,9.7 R20.2
NetD12_2: D12.2 J3.7 | length 3.1
  Top Layer w0.3: D12.2 34.608,6.532 35.06,6.08 J3.7
NetD13_1: D13.1 R21.2 | length 1.6
  Top Layer w0.3: D13.1 41.05,9.7 R21.2
NetD13_2: D13.2 J3.2 | length 6.4
  Top Layer w0.3: D13.2 41.075,6.85 41.195,6.73 v1(41.82,6.73)
  Bottom Layer w0.3: J3.2 42.33,3.19 42.33,6.17 41.82,6.68 v1(41.82,6.73)
NetD17_1: D17.1 R25.1 | length 2.6
  Top Layer w0.3: D17.1 14.734,3.602 R25.1
NetJ3_9: J3.9 R42.2 | length 9.9
  Top Layer w0.381: J3.9 33.81,4.67 33.81,12.068 R42.2
NETP2: CON1.2 J4.1 R6.2 | length 35.1
  Top Layer w0.254: R6.2 40.125,26.825 CON1.2 43.3,30 43.3,31.5 49.275,37.475 60.875,37.475 62.9,39.5 ; 62.9,39.5 63.15,39.75 J4.1 63.375,39.5 62.9,39.5
NetQ1_1: Q1.1 R9.1 | length 3.3
  Top Layer w0.4: Q1.1 40.5,16.499 40.5,18.137 R9.1
NetQ2_3: Q2.3 R42.1 | length 1.7
  Top Layer w0.254: Q2.3 34.841,14 R42.1
NetQ2_4: Q2.4 R24.2 | length 1.6
  Top Layer w0.2: R24.2 Q2.4
NetQ2_5: Q2.5 R12.2 | length 3.5
  Top Layer w0.254: Q2.5 32.125,13.5 32.375,13.75 32.375,14.325 33.083,15.033 ; 33.083,15.033 33.233,15.183 R12.2 33.083,15.35 33.083,15.033
NetR1_2: R1.2 U3.2 | length 3.1
  Top Layer w0.25: R1.2 44.95,16.89 46.499,15.341 U3.2
NetR2_2: R2.2 U3.19 | length 3.4
  Top Layer w0.25: U3.19 52.67,14.84 54.65,16.82 R2.2@54.77,16.82
NetR3_2: R3.2 U3.16 | length 2.9
  Top Layer w0.25: U3.16 53.519,13.339 54.21,14.03 R3.2
NetR4_2: R4.2 U3.7 | length 2.8
  Top Layer w0.25: R4.2 45.712,12.839 U3.7
NetR5_2: R5.2 U3.12 | length 4.4
  Top Layer w0.2: U3.12 50.2,11.37 50.56,11.01 51.64,11.01 52.35,10.3 52.83,10.3 53.339,9.791 R5.2
NetR8_1: R8.1 U3.23 | length 2.4
  Top Layer w0.28: U3.23 50.701,17.451 50.89,17.64 50.89,19.109 R8.1
NetR26_1: R26.1 R28.1 U3.14 | length 31.4
  Top Layer w0.2: R28.1 26.683,20.25 27.695,20.25 28.153,19.792 R26.1 29.02,19.625 29.47,19.175 29.47,18.495 v2(29.99,17.975) ; U3.14 51.201,11.609 51.3,11.51 v2(52.08,11.51)
  Bottom Layer w0.2: v2@30.115,17.975 40.6,17.975 46.165,12.41 51.18,12.41 v2(52.08,11.51)
NetR27_1: R27.1 U3.27 | length 2.4
  Top Layer w0.28: R27.1 48.58,19.089 48.58,17.64 48.699,17.521 U3.27
NetR30_2: R30.2 U3.11 | length 3.9
  Top Layer w0.2: U3.11 49.7,11.34 50.38,10.66 51.38,10.66 52.333,9.707 R30.2
NetR32_1: R32.1 U3.9 | length 2.9
  Top Layer w0.2: U3.9 48.699,11.251 50.307,9.643 R32.1
NetR34_1: R34.1 U3.10 | length 3.5
  Top Layer w0.2: U3.10 49.21,11.829 49.21,11.3 50.2,10.31 50.845,10.31 51.326,9.829 R34.1
NRST: C16.2 R11.2 R31.1 U6.7 | length 23.2
  Top Layer w0.2: C16.2 C16.2@17.611,3.601 ; C16.2@17.79,3.78 C16.2@17.611,3.601 ; U6.7 18,12.05 19.175,10.875 20.45,10.875 v1(20.7,10.625) 21.225,10.1 22.925,10.1 23.85,9.175 23.85,5.4 22.9,4.45 20.121,4.45 R31.1 C16.2@17.611,3.601 ; v1(24.33,10.63) 25.223,10.63 R11.2
  Bottom Layer w0.2: v1@20.705,10.63 v1(24.33,10.63)
NTC_1601: C10.2 TR1.2 U6.11 | length 30.7
  Top Layer w0.2: TR1.2@4.947,21.738 TR1.2 ; C10.2 6.25,22.082 v1(6.25,17.85) ; U6.11 19.6,12.075 19.8,11.875 20.175,11.875 20.375,12.075 21.1,12.075 v1(21.9,11.275)
  Top Layer w0.254: TR1.2@4.947,21.738 C10.2 C10.2@5.165,23.385
  Bottom Layer w0.2: v1(6.25,17.85) 6.25,16.275 7.775,14.75 11.79,14.75 15.09,11.45 21.725,11.45 v1(21.9,11.275)
OGND: J3.5 J3.6 Q1.2 | length 12.6
  Top Layer w1.3: J3.6 J3.5 37.3,4.16 37.3,5.55 37.725,5.975 37.725,11.425 38.88,12.58 Q1.2
OSC32K_I: C14.1 U6.3 Y1.2 | length 9
  Top Layer w0.2: Y1.2 12.595,7.325 ccw(c12.052,7.868) 12.82,7.868 12.82,8.93 cw(c13.568,8.93) 13.039,9.459 ; 13.039,9.459 13.485,9.905 cw(c14.028,9.362) 14.028,10.13 15.337,10.13 ccw(c15.337,11.103) 16.025,10.415 16.165,10.555 ; 16.165,10.555 ccw(c15.598,11.122) 16.4,11.122 U6.3
OSC32K_O: C15.1 U6.4 Y1.1 | length 8.8
  Top Layer w0.2: Y1.1 13.852,7.192 cw(c14.34,7.68) 13.65,7.68 13.65,9.284 cw(c14.026,9.284) 13.76,9.55 13.85,9.64 cw(c14.043,9.447) 14.043,9.72 15.552,9.72 ccw(c15.552,10.608) 16.179,9.979 ; 16.18,9.98 16.525,10.325 ccw(c15.861,10.989) 16.8,10.989 U6.4
OSC32M_I: C17.2 U6.5 Y2.1 | length 10
  Top Layer w0.2: C17.2 17.098,6.57 Y2.1 18.92,6.57 19.61,7.26 ccw(c19.006,7.864) 19.86,7.864 19.86,8.76 ccw(c19.256,8.76) 19.683,9.187 19.465,9.405 ccw(c18.922,8.862) 18.922,9.63 18.174,9.63 cw(c18.174,10.134) 17.818,9.778 17.398,10.198 cw(c17.874,10.674) 17.2,10.674 U6.5
OSC32M_O: C18.2 U6.6 Y2.3 | length 8.1
  Top Layer w0.2: U6.6 17.6,10.783 ccw(c18.163,10.783) 17.765,10.385 ; 17.765,10.385 17.975,10.175 ccw(c18.422,10.622) 18.422,9.99 19.09,9.99 cw(c19.09,9.073) 19.739,9.721 20.219,9.241 cw(c19.877,8.9) 20.36,8.9 20.36,8.858 ccw(c20.718,8.858) Y2.3@20.465,8.605 ; Y2.3@20.465,8.605 Y2.3 22.582,8.17 C18.2
PA13/SWDIO: J2.2 U6.34 | length 8.7
  Top Layer w0.2: J2.2 13.58,18.355 v2(14.8,19.575) ; v2(16.31,19.42) 16.4,19.33 U6.34
  Bottom Layer w0.2: v2(14.8,19.575) 16.155,19.575 v2(16.31,19.42)
PA14/SWCLK: J2.3 U6.37 | length 6.1
  Top Layer w0.2: J2.3 10.04,17.875 13.8,17.875 13.995,17.68 U6.37
SLED: D17.2 U6.2 | length 16.2
  Top Layer w0.2: D17.2@13.03,3.782 D17.2 10.923,3.602 9.9,4.625 9.9,8.875 12.075,11.05 12.85,11.05 13.325,11.525 15.5,11.525 16,12.025 U6.2
SPI_FLASH_CLK: U6.26 U10.6 | length 25
  Top Layer w0.2: U6.26 19.6,20.526 cw(c20.624,20.526) 19.9,21.25 20.181,21.531 ; 20.181,21.531 20.431,21.781 cw(c20.9,21.311) 20.9,21.975 22.375,21.975 cw(c22.375,21.692) 22.658,21.692 22.658,21 ccw(c22.941,21) 22.941,20.717 23.083,20.717 ccw(c23.083,21) 23.366,21 23.366,21.692 cw(c23.649,21.692) 23.649,21.975 23.791,21.975 cw(c23.791,21.692) 24.074,21.692 24.074,20.75 ccw(c24.357,20.75) 24.357,20.467 24.499,20.467 ccw(c24.499,20.75) 24.782,20.75 24.782,21.692 cw(c25.065,21.692) 25.065,21.975 25.207,21.975 cw(c25.207,21.692) 25.49,21.692 25.49,21 ccw(c25.773,21) 25.773,20.717 25.915,20.717 ccw(c25.915,21) 26.198,21 26.198,21.692 cw(c26.481,21.692) 26.481,21.975 26.623,21.975 cw(c26.623,21.692) 26.906,21.692 26.906,21.3 ccw(c27.189,21.3) 27.189,21.017 27.331,21.017 ccw(c27.331,21.3) 27.614,21.3 27.614,21.692 cw(c27.897,21.692) 27.897,21.975 28.039,21.975 cw(c28.039,21.692) 28.322,21.692 28.322,21.15 ccw(c28.605,21.15) 28.605,20.867 28.747,20.867 ccw(c28.747,21.15) 29.03,21.15 29.03,21.692 cw(c29.313,21.692) 29.196,21.95 cw(c29.313,21.692) 29.313,21.975 ; 29.365,21.975 29.313,21.975 ; U10.6 30.565,20.635 cw(c30.565,21.263) 30.121,20.819 29.996,20.944 cw(c30.252,21.2) 29.89,21.2 29.89,21.348 ccw(c29.227,21.348) 29.696,21.817 ccw(c29.313,21.434) 29.313,21.975
SPI_FLASH_CS: U6.25 U10.1 | length 24.6
  Top Layer w0.2: U6.25 20,20.35 cw(c20.845,20.35) 20.247,20.947 20.441,21.141 cw(c20.825,20.757) 20.825,21.3 21.2,21.3 cw(c21.2,20.817) 21.541,21.159 v2(21.825,20.875) ; U10.1 37.24,18.095 ccw(c37.24,18.686) 37.658,18.268 38.243,18.853 ccw(c37.645,19.45) 38.49,19.45 v2(38.49,20.225)
  Bottom Layer w0.2: v2(21.825,20.875) 21.998,20.702 ccw(c22.425,21.129) 22.425,20.525 28.288,20.525 cw(c28.288,20.013) 28.65,20.375 ; 28.675,20.35 ccw(c28.977,20.652) 28.977,20.225 v2(38.49,20.225)
SPI_FLASH_MISO: U6.27 U10.2 | length 24.6
  Top Layer w0.2: U6.27 19.2,20.825 cw(c20.468,20.825) 19.571,21.721 v2(19.8,21.95) ; U10.2 37.037,19.365 ccw(c37.037,20.253) 37.665,19.625 37.79,19.75 ; 37.79,19.75 ccw(c37.368,20.172) 37.965,20.172 v2(37.965,20.725)
  Bottom Layer w0.2: v2(19.8,21.95) 21.5,21.95 cw(c21.5,21.165) 22.055,21.72 22.442,21.333 ; 22.443,21.332 ccw(c23.125,22.016) 23.125,21.05 28.57,21.05 cw(c28.57,20.495) 28.962,20.888 ; 28.966,20.884 ccw(c29.35,21.268) 29.35,20.725 v2(37.965,20.725)
SPI_FLASH_MOSI: U6.28 U10.5 | length 25
  Top Layer w0.2: U6.28 18.8,21.265 cw(c19.91,21.265) 19.124,22.049 19.32,22.245 cw(c19.875,21.69) 19.875,22.475 22.626,22.475 ccw(c22.626,22.758) 22.909,22.758 22.909,23.375 cw(c23.192,23.375) 23.192,23.658 23.334,23.658 cw(c23.334,23.375) 23.617,23.375 23.617,22.77 ccw(c23.9,22.77) 23.9,22.487 24.042,22.487 ccw(c24.042,22.77) 24.325,22.77 24.325,23.375 cw(c24.608,23.375) 24.608,23.658 24.75,23.658 cw(c24.75,23.375) 25.033,23.375 25.033,22.77 ccw(c25.316,22.77) 25.316,22.487 25.458,22.487 ccw(c25.458,22.77) 25.741,22.77 25.741,23.375 cw(c26.024,23.375) 26.024,23.658 26.166,23.658 cw(c26.166,23.375) 26.449,23.375 26.449,22.758 ccw(c26.732,22.758) 26.732,22.475 26.874,22.475 ccw(c26.874,22.758) 27.157,22.758 27.157,23.375 cw(c27.44,23.375) 27.44,23.658 27.582,23.658 cw(c27.582,23.375) 27.865,23.375 27.865,22.746 ccw(c28.148,22.746) 28.067,22.475 28.342,22.475 ccw(c28.342,22.758) 28.625,22.758 28.625,23.225 cw(c28.908,23.225) 28.908,23.508 29.05,23.508 cw(c29.05,23.225) 29.333,23.225 29.333,22.875 ccw(c29.653,22.875) 29.427,22.648 ccw(c29.724,22.946) 29.724,22.525 cw(c29.724,22.101) 30.024,22.401 30.341,22.084 ccw(c30.725,22.468) 30.725,21.925 U10.5@31.05,21.925
STROBE: R10.2 U6.12 | length 7.4
  Top Layer w0.2: U6.12 24.608,12.572 26.568,10.612 R10.2
VCC_IN: C6.1 C9.1 C13.2 J3.3 J3.4 L1.2 R9.2 R36.2 U3.22 U3.28 | length 45.7
  Top Layer w0.254: 41.75,13.47 C13.2
  Top Layer w0.28: C6.1@46.194,19.156 48.199,17.151 U3.28 ; U3.22 51.201,17.046 53.311,19.156 C9.1
  Top Layer w0.381: R9.2 42.512,19.487 42.875,19.85 R36.2
  Top Layer w0.5: 41.54,17.44 41.72,17.26
  Top Layer w0.8: C6.1 46.09,19.84 46.79,20.54 52.64,20.54 53.36,19.82 C9.1
  Top Layer w1: 39.06,4.76 39.85,5.55 42.31,5.55 ; L1.2 44.16,5.19 43.8,5.55 42.31,5.55 ; C6.1@45.67,19.12 45.24,18.69 43.15,18.69 41.72,17.26 41.72,11.87 42.97,10.62 42.97,6.21 42.31,5.55
  Top Layer w1.3: J3.4 J3.3 39.06,4.76
VCC_MV: C19.1 CON1.8 J4.3 R7.1 R36.1 | length 33.1
  Top Layer w0.381: R7.1 R36.1 C19.1 44.25,24.95 CON1.8 47.3,30 47.3,32 52,36.7 61.4,36.7 61.95,37.25 J4.3
VDD_3V3: C3.1 C4.1 C7.1 C29.2 C30.2 C31.2 C40.2 J2.1 L2.2 L3.2 L4.2 R7.2 R12.1 R25.2 R31.2 R32.2 R34.2 TR1.1 U2.3 U6.1 U6.24 U6.36 U6.48 U10.3 U10.7 U10.8 | length 173.9
  Top Layer w0.2: U6.48 C29.2 13.178,12.572 U6.1 ; C30.2@15.59,20.77 15.583,20.763 15.34,20.52 15.34,19.16 15.6,18.9 U6.36 ; U6.24 22.6,17.68 C31.2 ; U10.3 36.975,20.635 37.627,21.287 38.352,21.287 39.125,20.515 39.125,19.825 39.925,19.025
  Top Layer w0.254: v1(37.7,14.35) 38.225,14.875 38.6,14.875 38.925,15.2 38.925,17.55 39.925,18.55 39.925,19.025 40.4,19.5 41,19.5 41.5,20 R7.2 ; R32.2 R34.2 51.326,8.199 52.125,7.4 54.825,7.4 56.375,5.85 v1(56.375,5.375) ; U2.3 54.45,6.45 55.625,5.275 55.625,4.55 55.925,4.25 C3.1
  Top Layer w0.381: C40.2@5,17.925 C40.2 ; TR1.1 4.96,19.625 4.815,19.48 C40.2 ; 7.625,17.125 5.615,17.125 C40.2 ; 8.55,19.625 J2.1 ; U10.7 U10.8 31.045,15.567 C7.1 31.787,14.825 32.367,15.405 R12.1
  Top Layer w0.5: C30.2@15.31,20.77 C30.2@15.38,20.77 ; C30.2@15.59,20.77 C30.2@15.38,20.77 ; C30.2 15.583,20.763 15.387,20.763 C30.2@15.38,20.77 ; v1(21,20.75) 21,19.825 22.595,18.23 22.85,18.23 C31.2 ; L2.2 57.22,11.38 58.125,10.475 58.125,7.125 v1(56.875,5.875)
  Top Layer w0.6: 8.55,19.625 7.625,18.7 7.625,17.125 7.625,14.295 9.71,12.21 ; J2.1 10.388,20.763 C30.2@15.387,20.763 ; C29.2 12.47,12.85 11.83,12.21 9.71,12.21 ; v1(14.5,22) 14.5,21.65 C30.2@15.38,20.77 ; 15.15,1.175 R25.2 ; L3.2 R31.2 19.272,1.762 18.585,1.075 12.325,1.075 9.2,4.2 9.2,11.7 9.71,12.21
  Top Layer w0.8: L4.2 C4.1 56.238,2.713 56.601,3.076 C3.1 56.601,5.601 v1(56.875,5.875)
  Bottom Layer w0.5: v1(14.5,22) 18.7,22 19.95,20.75 v1(21,20.75) ; 51.13,4.47 51.13,4.5
  Bottom Layer w0.7: J2.1 10.45,19.625 12.05,18.025 13.875,18.025 17.3,14.6 37.38,14.6 44.275,7.705 44.275,5.845 45.62,4.5 51.13,4.5 55.5,4.5 v1(56.375,5.375) v1(56.875,5.875)
  other v1: 31.8,14.825
VDDA: C51.2 L3.1 U6.9 | length 15.6
  Top Layer w0.2: U6.9 18.8,12.025 19.025,11.8
  Top Layer w0.381: 19.025,11.8 19.45,11.375 20.875,11.375 21.625,10.625 23.125,10.625 24.375,9.375 24.375,5.075 22.899,3.599 C51.2 20.934,3.599 L3.1
pads on no net: CON1.0 CON1.1 CON1.3 CON1.6 CON1.7 Q2.1 Q2.2 Q2.6 U3.25 U6.10 U6.38 U6.39 U6.42 U6.43 Y2.4

## Polygon pours and split planes (outlines as drawn)
GND on Top Layer "GND_L01_P007" (solid, remove dead copper, pour order 7): -0.025,50.025 65.925,50.025 67.7,48.25 68,47.95 68,45.4 68,2.25 65.875,0.125 65.8,0.05 62.85,0.05 2.2,0.05 -0.05,2.3 -0.05,50 -0.025,50.025
GND on Bottom Layer "GND_L02_P009" (solid, remove dead copper, pour order 9): -0.025,50.025 65.925,50.025 67.7,48.25 68,47.95 68,45.4 68,2.25 65.875,0.125 65.8,0.05 62.85,0.05 2.2,0.05 -0.05,2.3 -0.05,50 -0.025,50.025

## Keep-outs
Keep-Out Layer:
  circle w0.127: c3.5,30 r1.7
  circle w0.127: c64.5,46 r1.7
  circle w0.127: c64.5,4 r1.7
  lines w0.127: 0,4 ccw(c4,4) 4,0 64,0 ccw(c64,4) 68,4 68,46 ccw(c64,46) 64,50 4,50 ccw(c4,46) 0,46 0,4 ; 3.695,19.285 4.385,19.285 4.385,22.115 3.705,22.115 3.705,19.295 3.695,19.285
Multi-Layer:
  circle w0.127: c3.5,30 r2.6
  circle w0.127: c64.5,46 r2.6
  circle w0.127: c64.5,4 r2.6

## Other copper
Top Layer:
  rectangle net GND: 2.225,16.875 3.325,18.725
  rectangle net GND: 1.775,19.775 2.9,21.525
  rectangle net VDD_3V3: 8.55,19.25 9.35,19.925
  rectangle net NetC1_1: 49.375,5.2 49.7,6.75
  rectangle net GND: 16.25,7.75 16.753,8.85
  rectangle net GND: 15.925,8.075 16.325,8.6
  rectangle net GND: 43.975,0.625 44.975,1.775
  rectangle net GND: 44.85,0.7 45.7,2.25
  rectangle net GND: 43.525,0.75 44.45,2.875
  rectangle net GND: 57.8,1.2 58.6,2.875
  rectangle net GND: 58.625,2.9 60.55,5.525
  rectangle net GND: 45.325,22.225 54.875,23.325
  rectangle net GND: 53.9,21.425 54.775,22.3
  rectangle net GND: 37.025,16.15 37.9,16.775
  rectangle net GND: 32.125,17.475 35.55,17.975
  rectangle net GND: 32.15,21.9 35.525,23
  rectangle net GND: 0.925,7.275 1.721,9.225
  rectangle net GND: 6.325,7.475 7.125,9.35
  rectangle net GND: 19.425,0.5 20.425,0.625
  pour cut-out: -0.175,7.125 0.65,7.95 6.6,7.95 6.625,7.925 6.625,1.1 7.2,0.525 7.2,0.05 7,-0.15 2.325,-0.15 -0.175,2.35
  region net NetC11_2: 46.95,13.98 46.18,13.98 45.45,14.71 44.18,14.71 43.3,15.59 42.8,15.59 42.8,15.32 43.9,14.22 45.26,14.22 45.78,13.7 46.95,13.7
  region net NetC11_1: 46.92,14.48 46.66,14.48 45.26,15.88 44.69,15.88 44.66,15.85 44.66,15.12 44.7,15.08 45.47,15.08 46.35,14.2 46.9,14.2 46.92,14.22
  region net A+: 50.337,16.838 50.337,17.502 50.56,17.725 50.56,18.11 50.42,18.211 50.029,18.211 49.898,18.081 49.898,17.55 50.058,17.39 50.058,16.838
  region net B+: 49.339,17.315 49.62,17.596 49.62,18.09 49.46,18.257 49.107,18.257 48.94,18.09 48.94,17.78 49.043,17.66 49.043,16.878 49.061,16.86 49.339,16.86
  region net VCC_IN: 48.338,17.206 46.213,19.331 45.701,19.331 45.701,18.967 48.149,16.519 48.225,16.519 48.338,16.632
  region net VCC_IN: 51.066,16.758 51.065,17.106 52.58,18.621 52.58,19.191 52.647,19.258 54.117,19.258 54.159,19.216 54.159,19.07 52.343,17.254 51.847,16.758 51.347,16.758
  region net NetR8_1: 50.56,16.804 50.56,17.508 50.75,17.698 50.75,18.19 50.139,18.801 50.139,19.456 50.216,19.533 51.693,19.533 51.736,19.49 51.736,18.172 50.841,17.277 50.841,16.822 50.823,16.804
  region net NetR27_1: 48.56,16.64 48.56,17.44 47.72,18.28 47.72,19.44 47.82,19.54 49.26,19.54 49.31,19.49 49.31,18.78 48.72,18.19 48.72,17.61 48.84,17.49 48.84,16.65 48.83,16.64
Bottom Layer:
  rectangle net GND: 45.4,30.125 47.15,32.125
  rectangle net GND: 43.475,27.85 45.175,29.875
  rectangle net GND: 32.075,21.15 35.65,21.775
  pour cut-out: -0.175,7.125 0.65,7.95 6.6,7.95 6.625,7.925 6.625,1.1 7.2,0.525 7.2,0.05 7,-0.15 2.325,-0.15 -0.175,2.35

## Silkscreen, mask and mechanical layers (free items; w line width, h text height)
Top Overlay:
  circle w0.127: c3.5,4 r1.7
  text "1" at 66.175,39.5 h0.7
  text "ORG" at 60.225,39.425 h0.65
  text "GND" at 60.225,38.175 h0.65
  text "VCC" at 60.225,36.925 h0.65
  text "GND" at 60.225,35.675 h0.65
  text "B-" at 60.7,30.675 h0.65
  text "B+" at 60.7,28.6 h0.65
  text "A-" at 60.7,26.675 h0.65
  text "A+" at 60.7,24.65 h0.65
  text "1" at 61.55,22.925 h0.7
  text "VDD" at 5.875,19.1 h0.7
  text "DIO" at 6.225,17.9 h0.7
  text "SCK" at 5.775,16.675 h0.7
  text "GND" at 5.75,15.425 h0.7
  text "L2-1" at 64.475,9.65 h2.54 r90
Bottom Overlay:
  lines w0.127: 26.13,8.43 42.27,8.43 ; 27.98,5.38 27.98,13.62 ; 29.93,5.39 29.93,13.65 ; 31.99,5.41 31.99,13.64 ; 33.94,5.42 33.94,13.68 ; 35.95,5.39 35.95,13.65 ; 37.97,5.4 37.97,13.66 ; 39.97,5.41 39.97,13.61 ; 42.3,5.4 26.11,5.4 26.11,13.68 42.3,13.68 42.3,13.38 42.3,5.41
  text "ORG" at 62.25,39.375 h0.8
  text "GND" at 62.25,38.125 h0.8
  text "VCC" at 62.25,36.875 h0.8
  text "GND" at 62.25,35.625 h0.8
  text "A+" at 50.95,32.075 h0.8
  text "B+" at 52.95,32 h0.8
  text "1" at 40.925,30.625 h0.8
  text "11" at 54.525,30.625 h0.8
  text "B-" at 62.875,30.625 h0.8
  text "2" at 40.925,28.625 h0.8
  text "B+" at 62.875,28.625 h0.8
  text "A-" at 53.05,27.275 h0.8
  text "B-" at 50.825,27.225 h0.8
  text "A-" at 62.875,26.625 h0.8
  text "A+" at 62.875,24.625 h0.8
  text "L2-1" at 61.175,9.925 h2.54 r270
  text "D4" at 34.57,9.15 h0.8 r270
  text "D0" at 40.65,9.16 h0.8 r270
  text "STROBE" at 26.53,9.13 h0.8 r270
  text "BUSY" at 28.58,9.13 h0.8 r270
  text "D2" at 30.62,9.12 h0.8 r270
  text "GND" at 36.6,9.13 h0.8 r270
  text "VCC" at 38.48,9.1 h0.8 r270
  text "TX" at 32.57,9.09 h0.8 r270
  text "RST" at 26.56,6.06 h0.8 r270
  text "D3" at 30.63,6.05 h0.8 r270
  text "RX" at 32.59,6.07 h0.8 r270
  text "D1" at 34.55,6.04 h0.8 r270
  text "D5" at 40.63,6.04 h0.8 r270
  text "ALM" at 28.63,5.96 h0.8 r270
  text "VCC" at 38.5,5.875 h0.8 r270
  text "GND" at 36.58,5.74 h0.8 r270

## Text inside footprints (layer, text, board x,y; h text height)
CON1: Top Overlay "12" at 51.789,26.722 h1; Top Overlay "11" at 53.546,30.619 h1; Top Overlay "1" at 40.448,30.563 h1; Top Overlay "2" at 40.478,28.6 h1
J3: Top Overlay "15" at 24.281,3.301 h1; Top Overlay "16" at 24.281,1.42 h1; Top Overlay "2" at 42.696,1.777 h1; Top Overlay "1" at 42.696,3.555 h1